# Altium PCB Jacks.PcbDoc
Units mil, origin at the board's own origin, x right, y up, seen from the top; angles counter-clockwise.
Board outline 1299.21 x 2440.94 mil, 2 copper layers (Top Layer, Bottom Layer); 5 components, 5 nets, 30 pads, 0 vias.
Unrouted connection lines stored in the file: 1.
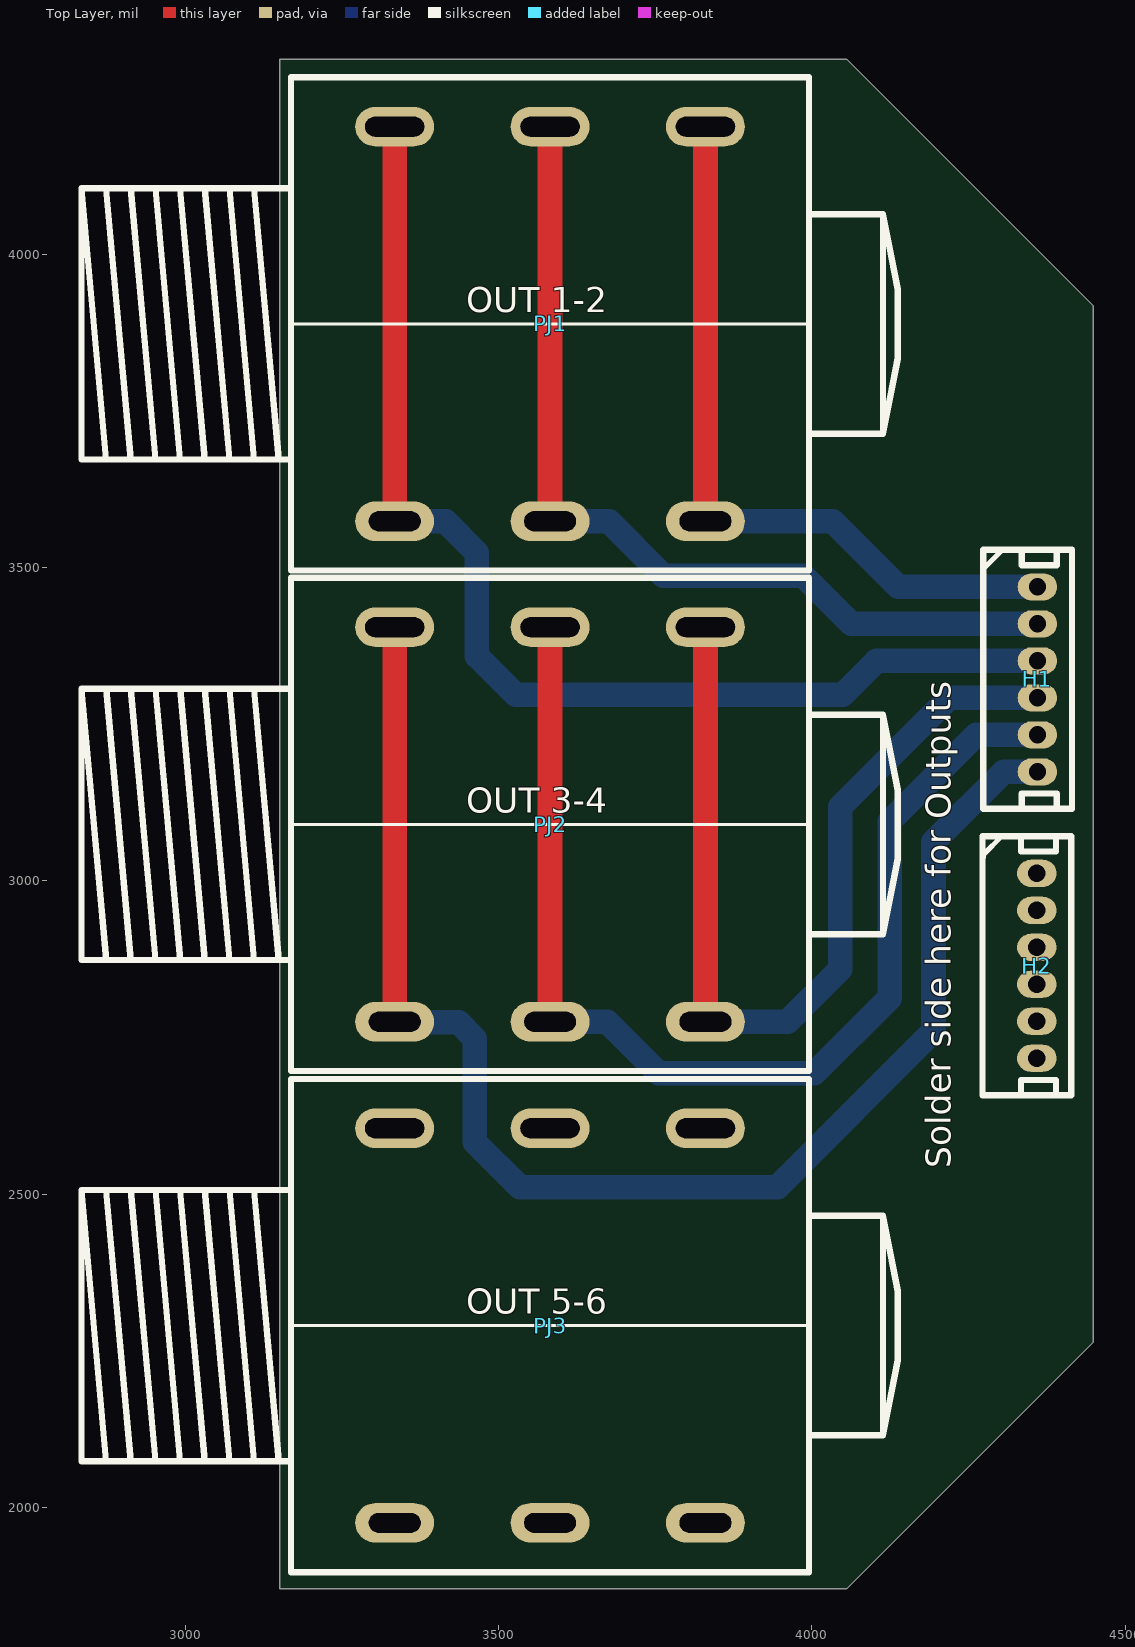
[diagram p0: Top Layer view]
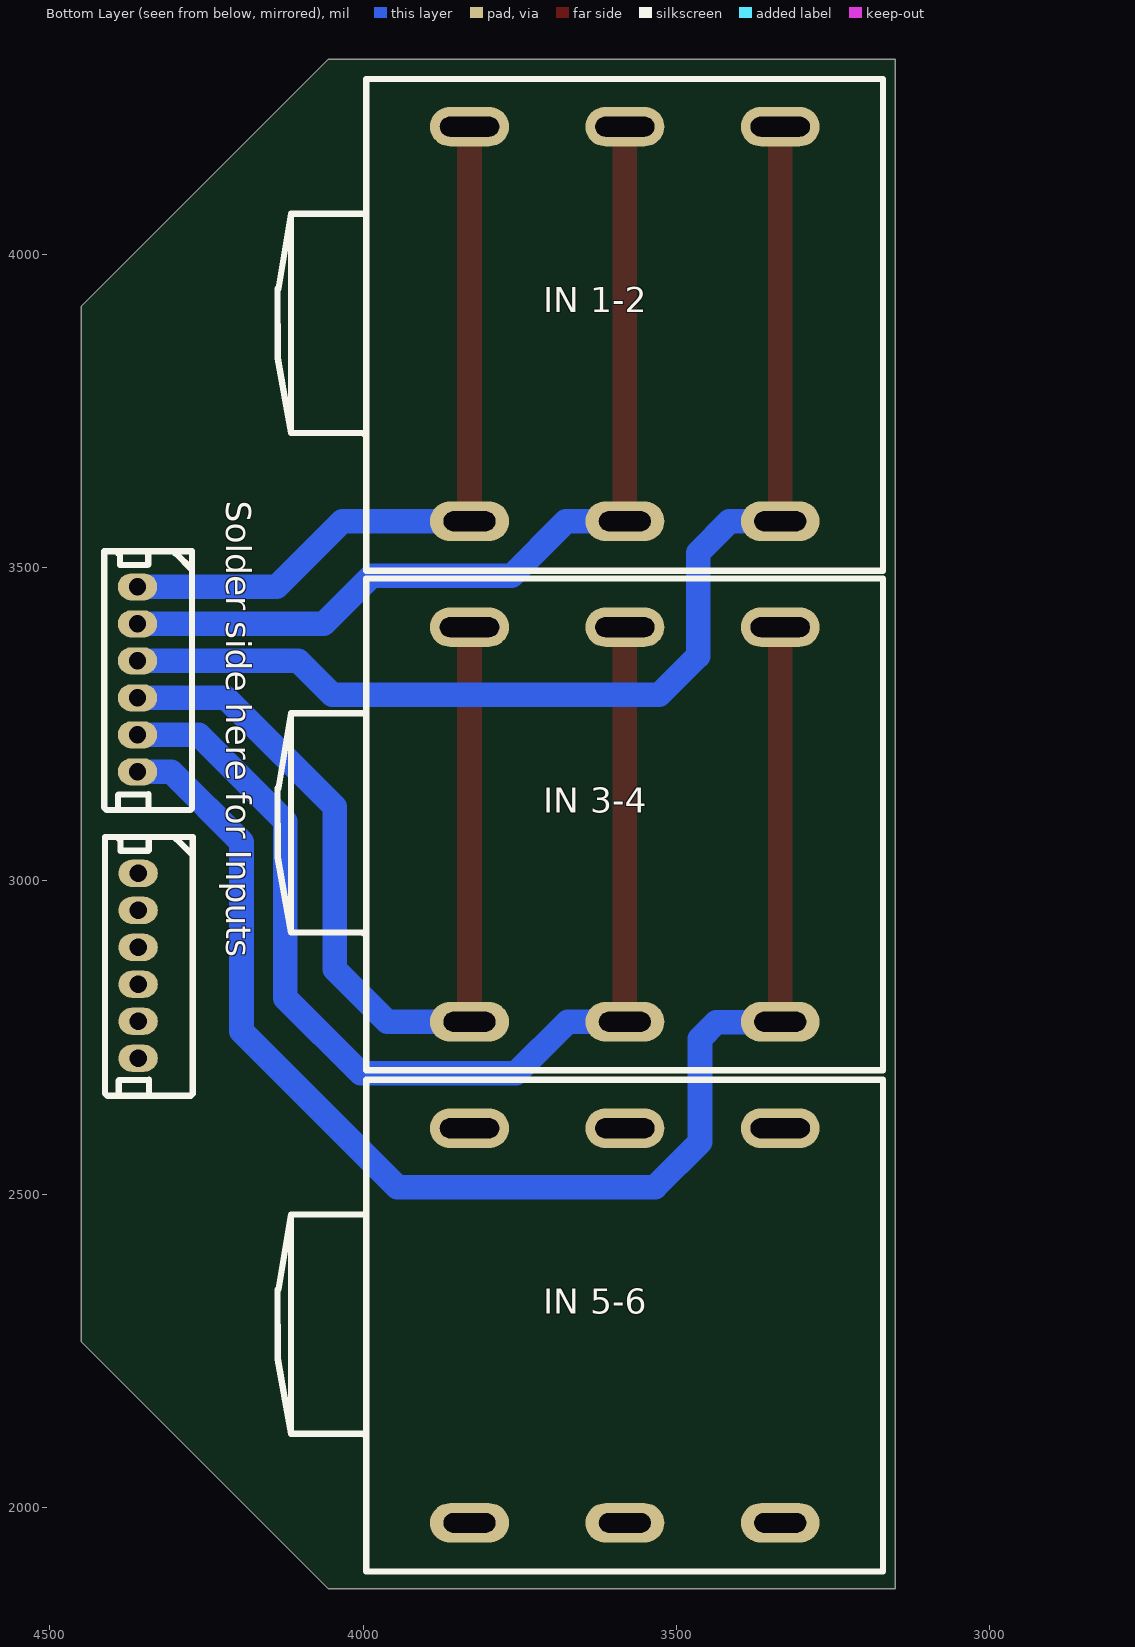
[diagram p1: Bottom Layer view, seen from below]
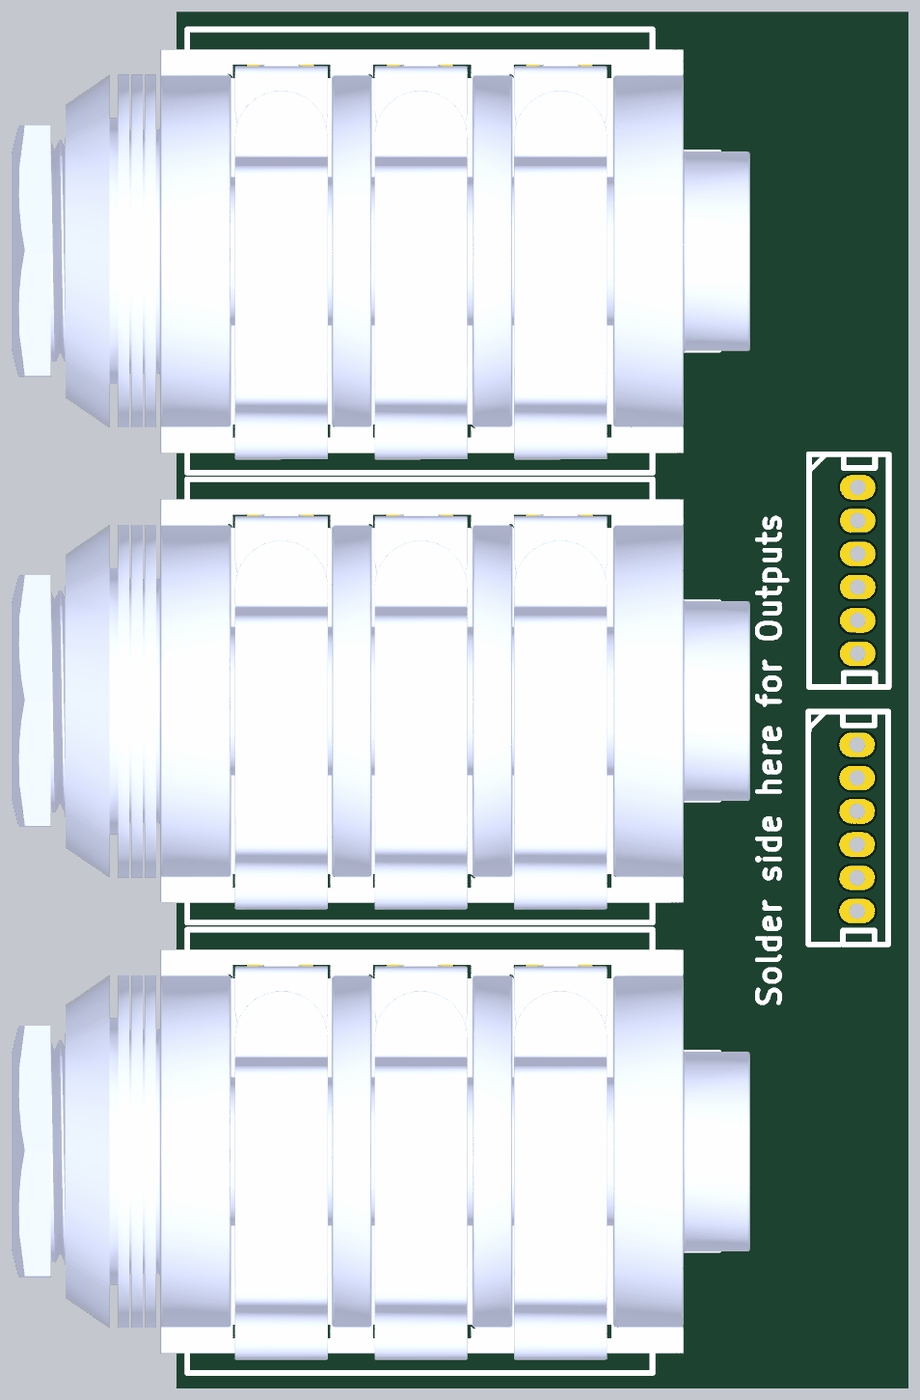
[diagram p2: 3D render of the assembled board from above, using the file's embedded part models]

## Layer stack, top to bottom
Top Solder: solder mask 0.4, Solder Resist, Dk 3.5
Top Layer: signal copper 1.4
Dielectric 1: dielectric 12.6, FR-4, Dk 4.8
Bottom Layer: signal copper 1.4
Bottom Solder: solder mask 0.4, Solder Resist, Dk 3.5

## Board outline
3150.25,1870.25 4055.76,1870.25 4449.46,2263.95 4449.46,3917.49 4055.76,4311.19 3150.25,4311.19

## Design rules (kind name [scope] priority, off if disabled: settings)
Clearance [All] p1: gap=10 ignorepadtopadclearanceinfootprint=FALSE except(0: Arc-Hole Track-Hole SMDPad-Hole THPad-Hole Via-Hole Fill-Hole Poly-Hole Region-Hole Text-Hole)
PolygonConnect [All] p1: connectstyle=Relief reliefconductorwidth=10 reliefentries=4 polygonreliefangle="90 Angle" airgapwidth=10
RoutingVias [All] p1: holewidth=28 width=50 viastyle="Through Hole" minholewidth=28 minwidth=50 maxholewidth=28 maxwidth=50
SolderMaskExpansion [All] p1: expansion=4 istentingtop=FALSE
Width [All] p1: maxlimit=39.37 minlimit=10 preferedwidth=10
30 further rules are at their usual default settings.

## Components (designator, comment, footprint, x,y, rotation, side; value= is the part's Value field where it differs from the comment)
H1 "1.5-6A" 1.5-6A 4360,3469.28 r270 top
H2 "1.5-6A" 1.5-6A 4359,3012 r270 top
PJ1 "PJ-609AE" PJ609AE 3333.94,3574 r0 top
PJ2 "PJ-609AE" PJ609AE 3333.97,2775 r0 top
PJ3 "PJ-609AE" PJ609AE 3333.94,1975.08 r0 top

## Footprints (in the part's own frame and the unit in brackets; to place one, negate y for a bottom-side part, rotate by r counter-clockwise, add the part's x,y. Pads: shape width x height; smd on the part's side, far side on the other; paste and mask are expansions set on the pad)
1.5-6A [mm] "Pin Header p=1.5mm, 6 pins"
  oval 1.1x1.6 hole 0.7: 1(0,0) 2(1.5,0) 3(3,0) 4(4.5,0) 5(6,0) 6(7.5,0)
  silkscreen extent -1.52,-2.2 9,1.4, body extent -1.4,-2.1 8.9,1.3, height 6
PJ609AE [mm] "HOOYA"
  oval 3.2x1.6 hole 0.8 slot 2.1 at 0 deg paste+0 mask+0.051: 2(0,0) 4(6.3,0) 6(12.6,0)
  oval 3.2x1.6 hole 0.8 slot 2.4 at 0 deg paste+0 mask+0.051: 3(0,16) 5(6.3,16) 7(12.6,16)
  silkscreen extent -12.7,-2 20.4,18, body extent -12.16,-1.4 21.2,17.09, height 16.2

## Part data
H1 H2: "Pin Header p=1.5mm, 6 pins"
PJ1 PJ2 PJ3: "6.3mm jack HOOYA"

## Nets (pads, with @x,y where several pads share a name; then routed paths per layer and width w, separated by ;. In a path a pad name is that pad's centre, name@x,y a point inside that pad or via, vN(x,y) a via of type N, cw(c..) or ccw(c..) an arc to the next point about the centre after c; other vN are vias at no path point)
GND_A: H1.3 H1.6 PJ1.2 PJ1.3 PJ2.2 PJ2.3 | length 4203.3
  Top Layer w39.37: PJ2.2 PJ2.3 ; PJ1.2 PJ1.3
  Bottom Layer w39.37: PJ2.2 3334.97,2774 3436,2774 3462,2748 3462,2583 3534,2511 3945,2511 4194,2760 4194,3062 4306,3174 H1.6 ; PJ1.2 3415,3574 3465,3524 3465,3359 3527,3297 4049,3297 4103.16,3351.16 H1.3
LOUT1: H1.1 PJ1.6 PJ1.7 | length 1203.3
  Top Layer w39.37: PJ1.6 PJ1.7
  Bottom Layer w39.37: PJ1.6 4033,3574 4137.73,3469.28 H1.1
LOUT2: H1.4 PJ2.6 PJ2.7 | length 1525.8
  Top Layer w39.37: PJ2.6 PJ2.7
  Bottom Layer w39.37: PJ2.6 3961,2775 4045,2859 4045,3118 4219.11,3292.11 H1.4
ROUT1: H1.2 PJ1.4 PJ1.5 | length 1475.8
  Top Layer w39.37: PJ1.4 PJ1.5
  Bottom Layer w39.37: PJ1.4 3676,3574 3762.82,3487.18 3985.82,3487.18 4062.78,3410.22 H1.2
ROUT2: H1.5 PJ2.4 PJ2.5 | length 1831.1
  Top Layer w39.37: PJ2.4 PJ2.5
  Bottom Layer w39.37: PJ2.4 3673.33,2775 3755.74,2692.59 4003.59,2692.59 4124,2813 4124,3095 4262.06,3233.05 H1.5
pads on no net: H2.1 H2.2 H2.3 H2.4 H2.5 H2.6 PJ3.2 PJ3.3 PJ3.4 PJ3.5 PJ3.6 PJ3.7

## Silkscreen, mask and mechanical layers (free items; w line width, h text height)
Top Overlay:
  text "OUT 1-2" at 3448,3908 h40
  text "OUT 3-4" at 3448.03,3109 h40
  text "Solder side here for Outputs" at 4221.67,2541 h40 r90
  text "OUT 5-6" at 3448,2309.08 h40
Bottom Overlay:
  lines w10: 3995,2112.5 4000,2117.5 4115,2117.5 ; 3995,2467.5 4115,2467.5 ; 3995,2912.5 4000,2917.5 4115,2917.5 ; 3995,3267.5 4115,3267.5 ; 3995,3710 4000,3715 4115,3715 ; 3995,4065 4115,4065 ; 4272,3037 4272,3041 4298,3067 4299,3067 ; 4273,3493 4273,3497 4299,3523 4300,3523 ; 4341.5,2657 4341.5,2682.5 4342,2682 4389,2682 4390,2681 4390,2657 ; 4342,3070 4342,3049 4343,3048 4387,3048 4387,3064 4390,3067 ; 4342.5,3113 4342.5,3138.5 4343,3138 4390,3138 4391,3137 4391,3113 ; 4343,3526 4343,3505 4344,3504 4388,3504 4388,3520 4391,3523 ; 4115,2117.5 4115,2467.5 ; 4115,2117.5 4136.21,2236.66 4136.49,2347.63 4135,2347.5 4115,2467.5 ; 4115,2917.5 4115,3267.5 ; 4115,2917.5 4136.21,3036.66 4136.49,3147.63 4135,3147.5 4115,3267.5 ; 4115,3715 4136.21,3834.16 4136.49,3945.13 4135,3945 4115,4065 ; 4115,3715 4115,4065 ; 3170,1897.5 3995,1897.5 3995,2682.5 3170,2682.5 3170,1897.5 ; 3170,2697.5 3995,2697.5 3995,3482.5 3170,3482.5 3170,2697.5 ; 3170,3495 3170,4280 3995,4280 3995,3495 3170,3495 ; 4272,2660 4272,3070 4412,3070 4412,2661 4408,2657 4275,2657 4272,2660 ; 4273,3116 4276,3113 4409,3113 4413,3117 4413,3526 4273,3526 4273,3116
  text "IN 1-2" at 3712,3908 h40
  text "Solder side here for Inputs" at 4218.67,3607 h40 r90
  text "IN 3-4" at 3712.03,3109 h40
  text "IN 5-6" at 3712,2309.08 h40
outline:
  lines w0.5: 3150.25,1870.25 4055.76,1870.25 4449.46,2263.95 4449.46,3917.49 4055.76,4311.19 3150.25,4311.19 3150.25,1870.25
  lines w5: 3971,3092 3971,3887 ; 4055,3888 4055.76,4311.19